# EAGLE board ATMEGA328P_Double (EAGLE 9.6.2)
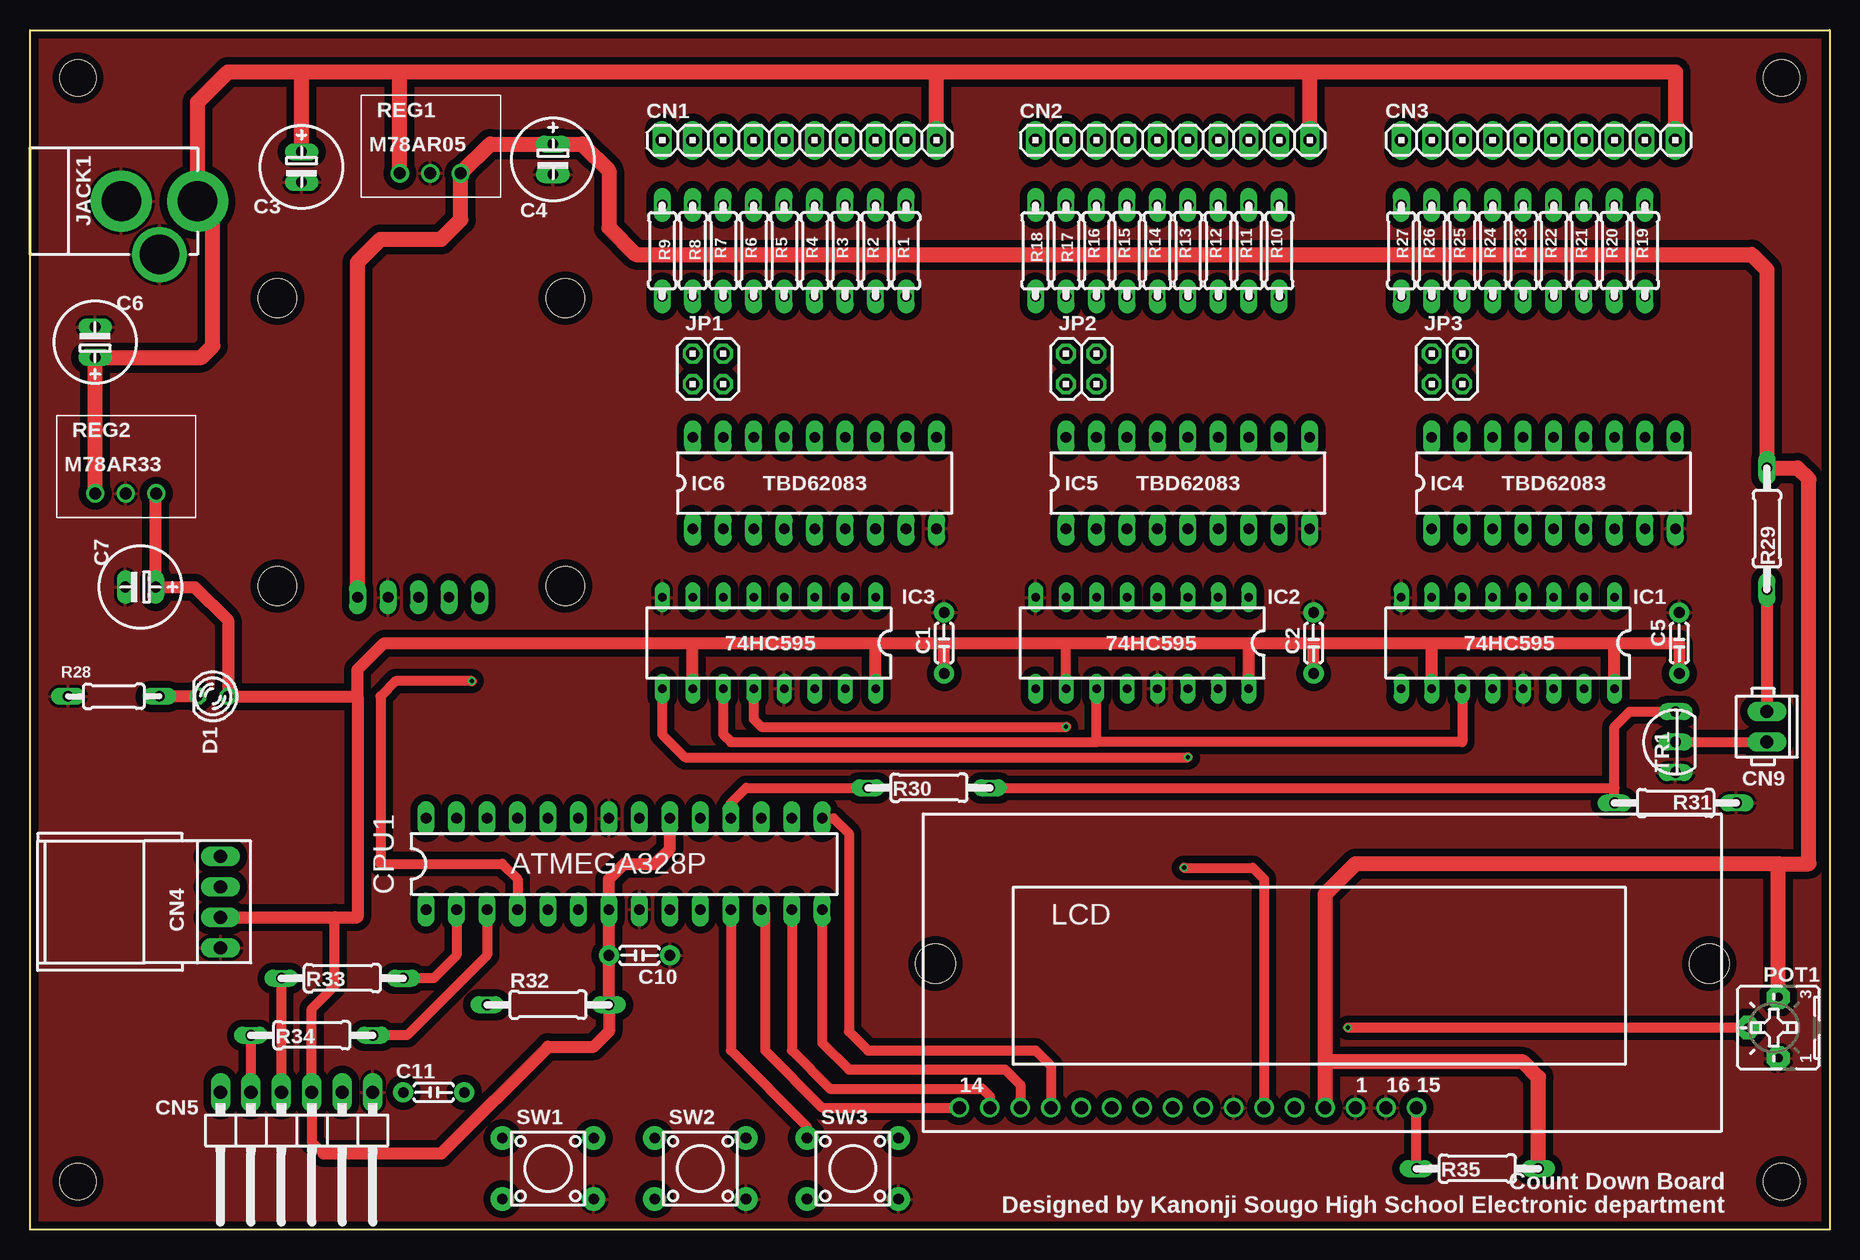
[diagram p0: board, top side]
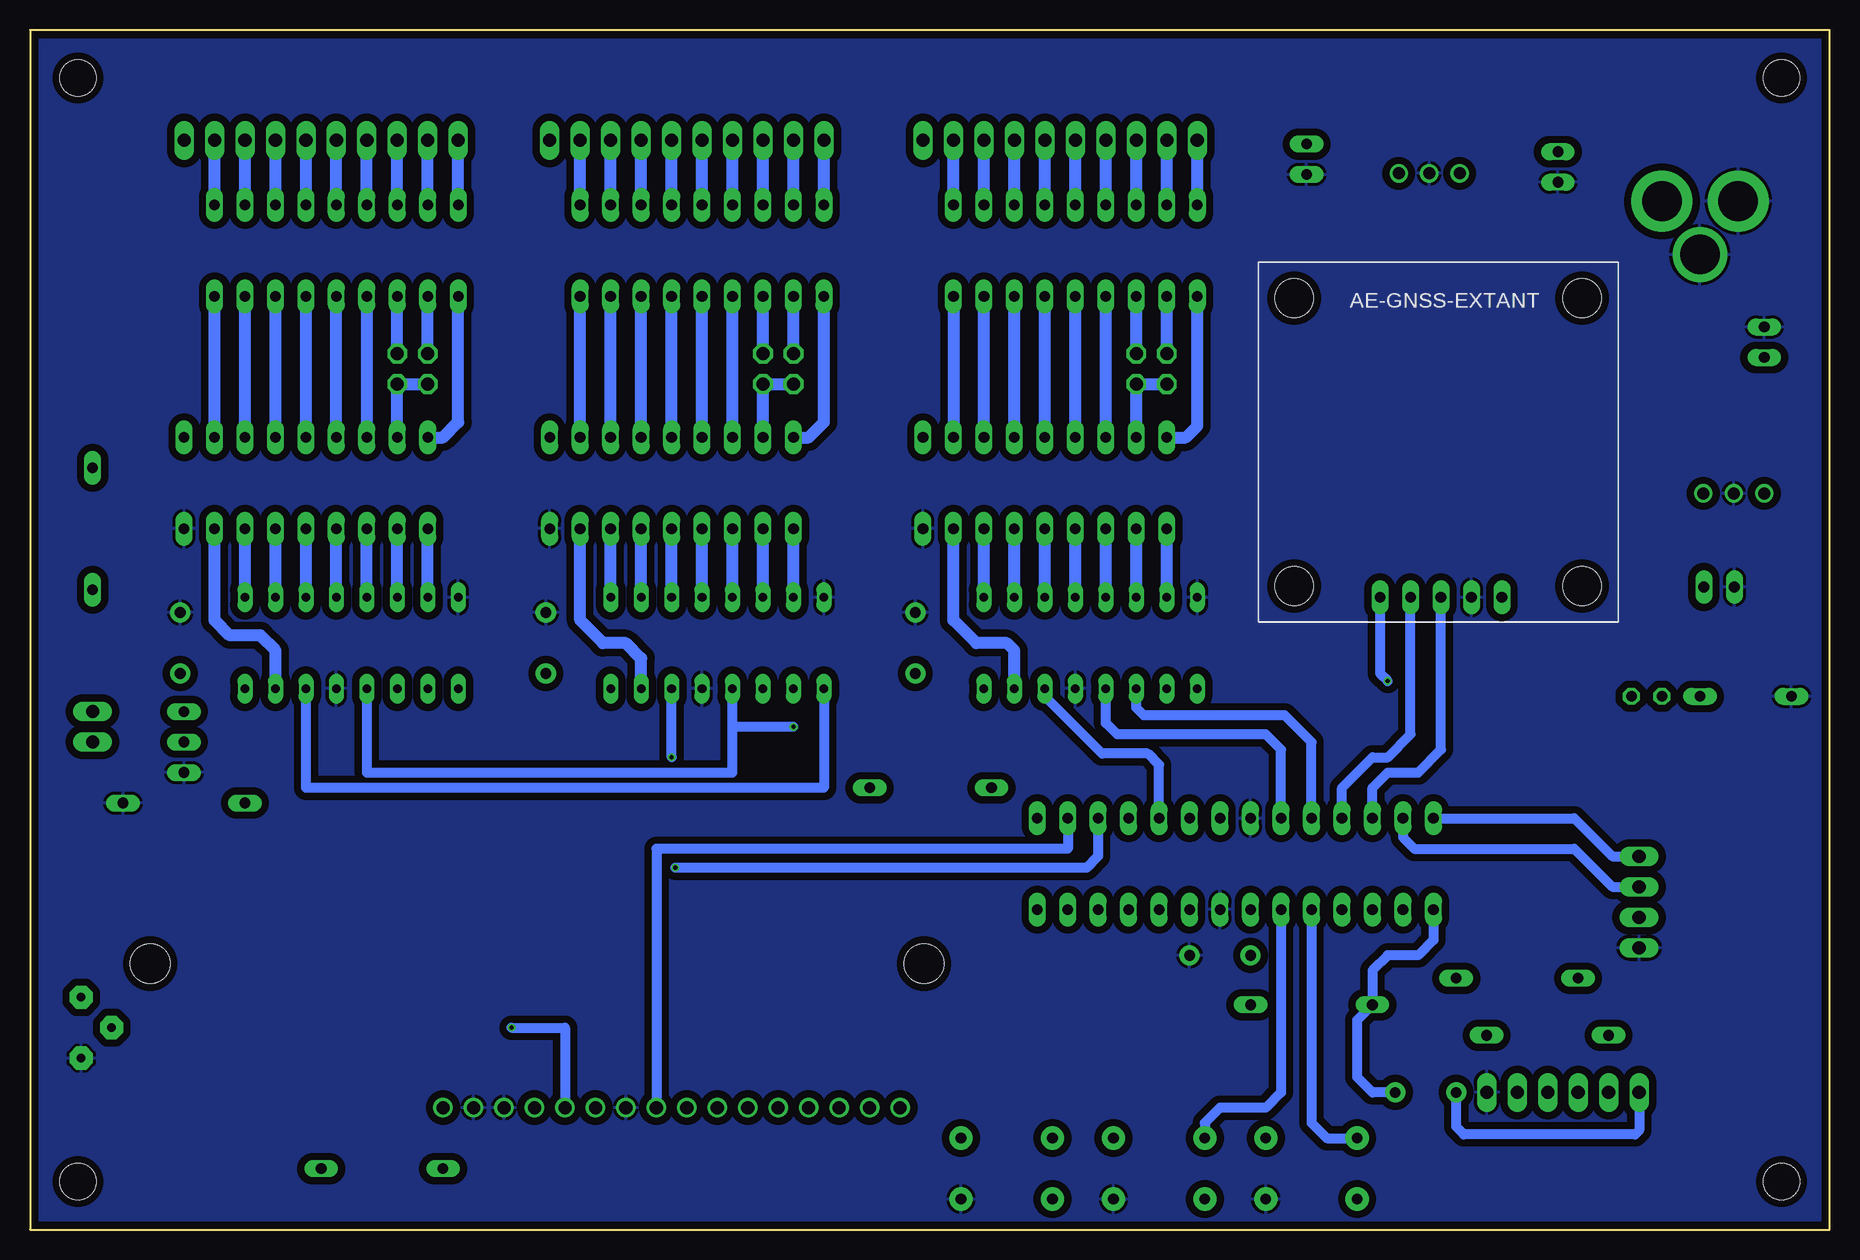
[diagram p1: board, bottom side, seen from below]

Size 150 x 100 mm. Coordinates in mm from the lower left corner, seen from the top.
Outline: 0,0 0,100 150,100 150,0 0,0
Copper layers (1*16): Top 0.035mm / dielectric 1.5mm / Bottom 0.035mm
Design rules "SeeedStudio_2layer_DRU_no_angle_20140221": minimum track width 6mil, minimum drill 12mil, track to track 6mil, track to pad 6mil, pad to pad 6mil, via to via 6mil, smd to smd 0mil, copper to edge 10mil, drill to drill 10mil, minimum pad ring 10mil, minimum via ring 6mil, stop-mask expansion 2mil, vias tented up to drill 100mil, thermal gap 10mil
Holes 3 mm at 4,96 146,96 146,4 4,4

## Footprints (pad centres in the part's own frame; a part is rotated, then mirrored left to right if it is on the bottom)
C5B3 = drill 0.889 pad 1.676: 1 -2.54,0; 2 2.54,0
E2,5-7 = drill 0.889 long: + -1.27,0; - 1.27,0
1X10 = drill 1.092 long: 1 -11.43,0; 2 -8.89,0; 3 -6.35,0; 4 -3.81,0; 5 -1.27,0; 6 1.27,0; 7 3.81,0; 8 6.35,0; 9 8.89,0; 10 11.43,0
4P-L = drill 1.092 long: 1 -3.81,0; 2 -1.27,0; 3 1.27,0; 4 3.81,0
1X06/90 = drill 1.092 long: 1 -6.35,-3.81; 2 -3.81,-3.81; 3 -1.27,-3.81; 4 1.27,-3.81; 5 3.81,-3.81; 6 6.35,-3.81
2P-S = drill 1.092 long: 1 -1.27,0; 2 1.27,0
DIL28-3 = drill 0.889 long: 1 -16.51,-3.81; 2 -13.97,-3.81; 3 -11.43,-3.81; 4 -8.89,-3.81; 5 -6.35,-3.81; 6 -3.81,-3.81; 7 -1.27,-3.81; 8 1.27,-3.81; 9 3.81,-3.81; 10 6.35,-3.81; 11 8.89,-3.81; 12 11.43,-3.81; 13 13.97,-3.81; 14 16.51,-3.81; 15 16.51,3.81; 16 13.97,3.81; 17 11.43,3.81; 18 8.89,3.81; 19 6.35,3.81; 20 3.81,3.81; 21 1.27,3.81; 22 -1.27,3.81; 23 -3.81,3.81; 24 -6.35,3.81; 25 -8.89,3.81; 26 -11.43,3.81; 27 -13.97,3.81; 28 -16.51,3.81
LED3MM = drill 0.889 octagon: A -1.27,0; K 1.27,0
AE-GNSS-EXTANT = drill 0.9 long: 1PPS 27.94,10.16; GND 27.94,17.78; RXD 27.94,12.7; TXD 27.94,15.24; VCC 27.94,20.32 | hole 3.2: 27,3; 27,27; 3,27; 3,3
DIL16 = drill 0.711 pad 1.27 long: 1 -8.89,-3.81; 2 -6.35,-3.81; 3 -3.81,-3.81; 4 -1.27,-3.81; 5 1.27,-3.81; 6 3.81,-3.81; 7 6.35,-3.81; 8 8.89,-3.81; 9 8.89,3.81; 10 6.35,3.81; 11 3.81,3.81; 12 1.27,3.81; 13 -1.27,3.81; 14 -3.81,3.81; 15 -6.35,3.81; 16 -8.89,3.81
DIL18 = drill 0.889 long: 1 -10.16,-3.81; 2 -7.62,-3.81; 3 -5.08,-3.81; 4 -2.54,-3.81; 5 0,-3.81; 6 2.54,-3.81; 7 5.08,-3.81; 8 7.62,-3.81; 9 10.16,-3.81; 10 10.16,3.81; 11 7.62,3.81; 12 5.08,3.81; 13 2.54,3.81; 14 0,3.81; 15 -2.54,3.81; 16 -5.08,3.81; 17 -7.62,3.81; 18 -10.16,3.81
DC15L = drill 3.302 pad 5.08: 1 0,0; 2 0,-6.35 | drill 3.302 pad 4.572: 3 4.445,-3.175
2X02 = drill 1.092 octagon: 1 -1.27,-1.27; 2 -1.27,1.27; 3 1.27,-1.27; 4 1.27,1.27
SD1602H = drill 1.092: 1 33.02,0; 2 30.48,0; 3 27.94,0; 4 25.4,0; 5 22.86,0; 6 20.32,0; 7 17.78,0; 8 15.24,0; 9 12.7,0; 10 10.16,0; 11 7.62,0; 12 5.08,0; 13 2.54,0; 14 0,0; 15 38.1,0; 16 35.56,0 | hole 3.302: -2,12; 62.5,12
POT_B25P = drill 0.711 pad 1.93 octagon: A -2.54,0; E 2.54,0; S 0,2.54
0207/7 = drill 0.889 long: 1 -3.81,0; 2 3.81,0
0204/7 = drill 0.889 long: 1 -3.81,0; 2 3.81,0
0207/10 = drill 0.889 long: 1 -5.08,0; 2 5.08,0
RE7805 = drill 1: GND 2.575,0.095; VIN 0.035,0.095; VOUT 5.115,0.095
B3F-10XX = drill 0.889 pad 1.93: 1 -3.81,2.54; 2 3.81,2.54; 3 -3.81,-2.54; 4 3.81,-2.54
TO92-LINE = drill 0.889 long: 1 2.54,0; 2 0,0; 3 -2.54,0

## Placement (x,y rotation side)
C1  0.1u  [C5B3]  76.2,48.9 90 top
C2  0.1u  [C5B3]  107,48.9 270 top
C3  100u  [E2,5-7]  22.64,88.58 270 top
C4  100u  [E2,5-7]  43.59,89.22 270 top
C5  0.1u  [C5B3]  137.48,48.9 270 top
C6  100u  [E2,5-7]  5.43,73.98 90 top
C7  100u  [E2,5-7]  9.21,53.56 180 top
C10  0.1u  [C5B3]  50.8,22.86 180 top
C11  [C5B3]  33.66,11.43 0 top
CN1  SEG_1  [1X10]  64.14,90.81 0 top
CN2  SEG_2  [1X10]  95.25,90.81 0 top
CN3  SEG_3  [1X10]  125.73,90.81 0 top
CN4  To I2C Device  [4P-L]  15.88,27.3 90 top
CN5  Writer  [1X06/90]  22.23,7.62 180 top
CN9  1PPS  [2P-S]  144.78,41.91 90 top
CPU1  ATMEGA328P  [DIL28-3]  49.53,30.48 0 top
D1  [LED3MM]  15.24,44.45 180 top
GPS1  [AE-GNSS-EXTANT]  47.62,80.64 270 bottom
IC1  74HC595  [DIL16]  123.19,48.9 180 top
IC2  74HC595  [DIL16]  92.71,48.9 180 top
IC3  74HC595  [DIL16]  61.59,48.9 180 top
IC4  TBD62083  [DIL18]  127,62.23 0 top
IC5  TBD62083  [DIL18]  96.52,62.23 0 top
IC6  TBD62083  [DIL18]  65.41,62.23 0 top
JACK1  [DC15L]  13.97,85.72 270 top
JP1  [2X02]  56.52,71.75 0 top
JP2  [2X02]  87.63,71.75 0 top
JP3  [2X02]  118.11,71.75 0 top
LCD  [SD1602H]  77.47,10.16 0 top
POT1  [POT_B25P]  145.73,16.83 90 top
R1  1k  [0207/7]  73.03,81.6 90 top
R2  1k  [0207/7]  70.48,81.6 90 top
R3  1k  [0207/7]  67.94,81.6 90 top
R4  1k  [0207/7]  65.41,81.6 90 top
R5  1k  [0207/7]  62.87,81.6 90 top
R6  1k  [0207/7]  60.33,81.6 90 top
R7  1k  [0207/7]  57.78,81.6 90 top
R8  1k  [0207/7]  55.24,81.6 90 top
R9  1k  [0207/7]  52.7,81.6 270 top
R10  1k  [0207/7]  104.14,81.6 90 top
R11  1k  [0207/7]  101.6,81.6 90 top
R12  1k  [0207/7]  99.06,81.6 90 top
R13  1k  [0207/7]  96.52,81.6 90 top
R14  1k  [0207/7]  93.98,81.6 90 top
R15  1k  [0207/7]  91.44,81.6 90 top
R16  1k  [0207/7]  88.9,81.6 90 top
R17  1k  [0207/7]  86.36,81.6 90 top
R18  1k  [0207/7]  83.82,81.6 270 top
R19  1k  [0207/7]  134.62,81.6 90 top
R20  1k  [0207/7]  132.08,81.6 90 top
R21  1k  [0207/7]  129.54,81.6 90 top
R22  1k  [0207/7]  127,81.6 90 top
R23  1k  [0207/7]  124.46,81.6 90 top
R24  1k  [0207/7]  121.92,81.6 90 top
R25  1k  [0207/7]  119.38,81.6 90 top
R26  1k  [0207/7]  116.84,81.6 90 top
R27  1k  [0207/7]  114.3,81.6 270 top
R28  1k  [0204/7]  6.99,44.45 180 top
R29  1k  [0207/10]  144.78,58.42 90 top
R30  1k  [0207/10]  74.93,36.83 0 top
R31  10k  [0207/10]  137.16,35.56 180 top
R32  10k  [0207/10]  43.18,18.73 0 top
R33  1k  [0207/10]  26.04,20.95 0 top
R34  1k  [0207/10]  23.5,16.19 0 top
R35  150  [0207/10]  120.65,5.08 0 top
REG1  M78AR05  [RE7805]  30.8,87.95 0 top
REG2  M78AR33  [RE7805]  5.4,61.28 0 top
SW1  [B3F-10XX]  43.18,5.08 0 top
SW2  [B3F-10XX]  55.88,5.08 0 top
SW3  [B3F-10XX]  68.58,5.08 0 top
TR1  2SC1815  [TO92-LINE]  137.16,40.64 90 top

## Library data of the parts
C1 C2 C5 C10 C11 = 1-cr
C3 C4 C6 C7 R1-R35 TR1 = akihabara
CN1-CN3 CN5 JP1-JP3 = pinhead
CN4 CN9 = 1-conn-jst
CPU1 IC4-IC6 = microchip
D1 IC1-IC3 POT1 = MyLib
GPS1 = akiduki
JACK1 = 1-conn
LCD = 1-display
REG1 REG2 = MCR_parts
SW1-SW3 = 1-sw

## Nets
1PPS/D2 [Signal]: CPU1.4 GPS1.1PPS
+3.3V [VCC]: C1.1 C2.2 C5.2 C7.+ C10.2 CN4.2 CN5.3 CPU1.7 CPU1.20 D1.A IC1.10 IC1.16 IC2.10 IC2.16 IC3.10 IC3.16 R32.2 REG2.VOUT
+5V [VCC]: C4.+ GPS1.VCC LCD.2 POT1.E R29.2 R35.2 REG1.VOUT
+VIN [VCC]: C3.+ C6.+ CN1.10 CN2.10 CN3.10 JACK1.1 REG1.VIN REG2.VIN
A4/SDA [Signal]: CN4.3 CPU1.27
A5/SCL [Signal]: CN4.4 CPU1.28
D1_A [Signal]: D1.K R28.1
DB4 [Signal]: CPU1.15 LCD.11
DB5 [Signal]: CPU1.14 LCD.12
DB6 [Signal]: CPU1.13 LCD.13
DB7 [Signal]: CPU1.12 LCD.14
DTR [Signal]: C11.1 CN5.6
EN [Signal]: CPU1.16 LCD.6
GND [GND]: C1.2 C2.1 C3.- C4.- C5.1 C6.- C7.- C10.1 CN4.1 CN5.1 CPU1.8 CPU1.22 GPS1.GND IC1.8 IC1.13 IC2.8 IC2.13 IC3.8 IC3.13 IC4.9 IC5.9 IC6.9 JACK1.2 JACK1.3 LCD.1 LCD.5 LCD.16 POT1.A R28.2 R31.1 REG1.GND REG2.GND SW1.4 SW2.4 SW3.4 TR1.3
GPS_RXD [Signal]: CPU1.25 GPS1.RXD
GPS_TXD [Signal]: CPU1.26 GPS1.TXD
IN_SEG1_A [Signal]: IC3.2 IC6.6
IN_SEG1_B [Signal]: IC3.3 IC6.5
IN_SEG1_C [Signal]: IC3.7 IC6.1
IN_SEG1_D [Signal]: IC3.5 IC6.3
IN_SEG1_DP [Signal]: IC3.6 IC6.2
IN_SEG1_E [Signal]: IC3.4 IC6.4
IN_SEG1_F [Signal]: IC3.15 IC6.8
IN_SEG1_G [Signal]: IC3.1 IC6.7
IN_SEG2_A [Signal]: IC2.2 IC5.6
IN_SEG2_B [Signal]: IC2.3 IC5.5
IN_SEG2_C [Signal]: IC2.7 IC5.1
IN_SEG2_D [Signal]: IC2.5 IC5.3
IN_SEG2_DP [Signal]: IC2.6 IC5.2
IN_SEG2_E [Signal]: IC2.4 IC5.4
IN_SEG2_F [Signal]: IC2.15 IC5.8
IN_SEG2_G [Signal]: IC2.1 IC5.7
IN_SEG3_A [Signal]: IC1.2 IC4.6
IN_SEG3_B [Signal]: IC1.3 IC4.5
IN_SEG3_C [Signal]: IC1.7 IC4.1
IN_SEG3_D [Signal]: IC1.5 IC4.3
IN_SEG3_DP [Signal]: IC1.6 IC4.2
IN_SEG3_E [Signal]: IC1.4 IC4.4
IN_SEG3_F [Signal]: IC1.15 IC4.8
IN_SEG3_G [Signal]: IC1.1 IC4.7
LCD_ANODE [Signal]: LCD.15 R35.1
OUT_1PPS [Signal]: CPU1.18 R30.1
OUT_LED_A [Signal]: CN9.2 R29.1
OUT_LED_K [Signal]: CN9.1 TR1.2
OUT_SEG1__DP [Signal]: IC6.17 JP1.1 JP1.3
OUT_SEG1_A [Signal]: IC6.13 R3.1
OUT_SEG1_B [Signal]: IC6.14 R4.1
OUT_SEG1_C [Signal]: IC6.18 R9.2
OUT_SEG1_D [Signal]: IC6.16 R6.1
OUT_SEG1_E [Signal]: IC6.15 R5.1
OUT_SEG1_F [Signal]: IC6.11 R1.1
OUT_SEG1_G [Signal]: IC6.12 R2.1
OUT_SEG2_A [Signal]: IC5.13 R12.1
OUT_SEG2_B [Signal]: IC5.14 R13.1
OUT_SEG2_C [Signal]: IC5.18 R18.2
OUT_SEG2_D [Signal]: IC5.16 R15.1
OUT_SEG2_DP [Signal]: IC5.17 JP2.1 JP2.3
OUT_SEG2_DP1 [Signal]: JP2.2 R17.1
OUT_SEG2_DP2 [Signal]: JP2.4 R16.1
OUT_SEG2_E [Signal]: IC5.15 R14.1
OUT_SEG2_F [Signal]: IC5.11 R10.1
OUT_SEG2_G [Signal]: IC5.12 R11.1
OUT_SEG3_A [Signal]: IC4.13 R21.1
OUT_SEG3_B [Signal]: IC4.14 R22.1
OUT_SEG3_C [Signal]: IC4.18 R27.2
OUT_SEG3_D [Signal]: IC4.16 R24.1
OUT_SEG3_DP [Signal]: IC4.17 JP3.1 JP3.3
OUT_SEG3_DP1 [Signal]: JP3.2 R26.1
OUT_SEG3_DP2 [Signal]: JP3.4 R25.1
OUT_SEG3_E [Signal]: IC4.15 R23.1
OUT_SEG3_F [Signal]: IC4.11 R19.1
OUT_SEG3_G [Signal]: IC4.12 R20.1
OUT_SEG_DP1 [Signal]: JP1.2 R8.1
OUT_SEG_DP2 [Signal]: JP1.4 R7.1
QH1->SER [Signal]: IC2.14 IC3.9
QH2-SER [Signal]: IC1.14 IC2.9
RCLK [Signal]: CPU1.23 IC1.12 IC2.12 IC3.12
RS [Signal]: CPU1.17 LCD.4
RST [Signal]: C11.2 CPU1.1 R32.1
RXD [Signal]: CPU1.2 R33.2
RXI<-TXD [Signal]: CN5.5 R34.1
SCLK [Signal]: CPU1.24 IC1.11 IC2.11 IC3.11
SEG1_A [Signal]: CN1.7 R3.2
SEG1_B [Signal]: CN1.6 R4.2
SEG1_C [Signal]: CN1.1 R9.1
SEG1_D [Signal]: CN1.4 R6.2
SEG1_DP1 [Signal]: CN1.2 R8.2
SEG1_DP2 [Signal]: CN1.3 R7.2
SEG1_E [Signal]: CN1.5 R5.2
SEG1_F [Signal]: CN1.9 R1.2
SEG1_G [Signal]: CN1.8 R2.2
SEG2_A [Signal]: CN2.7 R12.2
SEG2_B [Signal]: CN2.6 R13.2
SEG2_C [Signal]: CN2.1 R18.1
SEG2_D [Signal]: CN2.4 R15.2
SEG2_DP1 [Signal]: CN2.2 R17.2
SEG2_DP2 [Signal]: CN2.3 R16.2
SEG2_E [Signal]: CN2.5 R14.2
SEG2_F [Signal]: CN2.9 R10.2
SEG2_G [Signal]: CN2.8 R11.2
SEG3_A [Signal]: CN3.7 R21.2
SEG3_B [Signal]: CN3.6 R22.2
SEG3_C [Signal]: CN3.1 R27.1
SEG3_D [Signal]: CN3.4 R24.2
SEG3_DP1 [Signal]: CN3.2 R26.2
SEG3_DP2 [Signal]: CN3.3 R25.2
SEG3_E [Signal]: CN3.5 R23.2
SEG3_F [Signal]: CN3.9 R19.2
SEG3_G [Signal]: CN3.8 R20.2
SER/D12 [Signal]: CPU1.19 IC3.14
SW1 [Signal]: CPU1.5 SW1.1
SW2 [Signal]: CPU1.6 SW2.1
SW3/D4 [Signal]: CPU1.11 SW3.1
TR1_B [Signal]: R30.2 R31.2 TR1.1
TXD [Signal]: CPU1.3 R34.2
TXD->RXD [Signal]: CN5.4 R33.1
VO [Signal]: LCD.3 POT1.S

## Tracks (layer width: path | path; a pad name or v marks a point on that pad's centre or on a via)
1PPS/D2  (via drill 0.35)
  Top 0.813: v36.83,45.72 30.48,45.72 29.21,44.45 29.21,30.48 39.37,30.48 40.64,29.21 CPU1.4
  Bottom 0.813: GPS1.1PPS 37.47,46.35 v36.83,45.72
+3.3V
  Top 0.813: IC2.10 86.36,48.9 | 24.45,6.35 23.5,7.3 CN5.3 23.5,18.41 25.4,20.32 25.4,26.04
  Top 1.016: 27.3,44.45 27.3,46.67 29.53,48.9 55.24,48.9 | 27.3,44.45 D1.A 16.51,50.8 13.75,53.56 C7.+ 10.48,61.37 REG2.VOUT | 55.24,48.9 70.8,48.9 | 70.8,48.9 76.52,48.9 | 76.52,48.9 86.36,48.9 101.6,48.9 | 101.6,48.9 107,48.9 | 107,48.9 116.84,48.9 | 116.84,48.9 132.08,48.9 | 132.08,48.9 137.48,48.9 C5.2 | IC1.16 132.08,48.9 | IC1.10 116.84,48.9 | C2.2 107,48.9 | IC2.16 101.6,48.9 | C1.1 76.2,48.58 76.52,48.9 | IC3.16 70.48,48.58 70.8,48.9 | IC3.10 55.24,48.9 | CN4.2 25.4,26.04 27.3,26.04 27.3,44.45 | CPU1.20 53.34,31.75 52.07,30.48 49.53,30.48 48.26,29.21 CPU1.7 C10.2 R32.2 48.26,16.51 46.99,15.24 43.18,15.24 34.29,6.35 24.45,6.35
+5V
  Top 1.27: GPS1.VCC 27.3,80.64 29.21,82.55 34.29,82.55 35.91,84.17 REG1.VOUT 38.36,90.49 C4.+ 46.04,90.49 48.26,88.27 48.26,83.5 50.48,81.28 143.51,81.28 144.78,80.01 R29.2 147.32,63.5 148.27,62.55 148.27,30.48 145.73,30.48 | 145.73,30.48 110.49,30.48 107.95,27.94 107.95,13.97 | 107.95,13.97 LCD.2 | POT1.E 145.73,30.48 | R35.2 125.73,12.7 124.46,13.97 107.95,13.97
+VIN
  Top 1.27: REG2.VIN C6.+ 14.29,72.71 15.24,73.66 15.24,84.45 JACK1.1 13.97,93.98 16.51,96.52 22.64,96.52 | 22.64,96.52 30.83,96.52 | 30.83,96.52 75.56,96.52 | 75.56,96.52 106.68,96.52 | 106.68,96.52 137.16,96.52 CN3.10 | CN2.10 106.68,96.52 | CN1.10 75.56,96.52 | REG1.VIN 30.83,96.52 | C3.+ 22.64,96.52
A4/SDA
  Bottom 0.813: CPU1.27 35.56,32.7 34.61,31.75 21.27,31.75 18.1,28.57 CN4.3
A5/SCL
  Bottom 0.813: CN4.4 18.1,31.11 21.27,34.29 CPU1.28
D1_A
  Top 1.016: D1.K R28.1
DB4
  Top 0.813: CPU1.15 66.99,34.29 68.26,33.02 68.26,16.51 69.85,14.92 83.82,14.92 85.09,13.65 LCD.11
DB5
  Top 0.813: CPU1.14 66.04,15.56 68.26,13.34 81.28,13.34 82.55,12.06 LCD.12
DB6
  Top 0.813: CPU1.13 63.5,14.92 66.67,11.75 79.38,11.75 80.01,11.11 LCD.13
DB7
  Top 0.813: CPU1.12 61.28,26.35 61.28,14.92 66.04,10.16 LCD.14
DTR
  Bottom 0.813: CN5.6 15.88,8.26 16.19,7.94 30.48,7.94 31.11,8.57 C11.1
EN
  Bottom 0.813: CPU1.16 63.5,31.75 97.79,31.75 LCD.6
GND
  pour Top (isolate 0.61): -1.27,101.47 151.13,101.47 151.13,-1.27 -1.27,-1.27
  pour Bottom (isolate 0.61): -1.27,101.47 151.13,101.47 151.13,-1.27 -1.27,-1.27
GPS_RXD
  Bottom 0.813: CPU1.25 40.64,36.83 38.1,39.37 36.83,39.37 34.92,41.27 GPS1.RXD
GPS_TXD
  Bottom 0.813: CPU1.26 38.1,36.83 36.83,38.1 34.29,38.1 32.38,40.01 GPS1.TXD
IN_SEG1_A
  Bottom 1.016: IC3.2 IC6.6
IN_SEG1_B
  Bottom 1.016: IC3.3 IC6.5
IN_SEG1_C
  Bottom 1.016: IC3.7 IC6.1
IN_SEG1_D
  Bottom 1.016: IC3.5 IC6.3
IN_SEG1_DP
  Bottom 1.016: IC3.6 IC6.2
IN_SEG1_E
  Bottom 1.016: IC3.4 IC6.4
IN_SEG1_F
  Bottom 1.016: IC3.15 67.94,48.26 68.58,48.9 71.12,48.9 73.03,50.8 IC6.8
IN_SEG1_G
  Bottom 1.016: IC3.1 IC6.7
IN_SEG2_A
  Bottom 1.016: IC2.2 IC5.6
IN_SEG2_B
  Bottom 1.016: IC2.3 IC5.5
IN_SEG2_C
  Bottom 1.016: IC2.7 IC5.1
IN_SEG2_D
  Bottom 1.016: IC2.5 IC5.3
IN_SEG2_DP
  Bottom 1.016: IC2.6 IC5.2
IN_SEG2_E
  Bottom 1.016: IC2.4 IC5.4
IN_SEG2_F
  Bottom 1.016: IC2.15 99.06,47.62 100.33,48.9 102.23,48.9 104.14,50.8 IC5.8
IN_SEG2_G
  Bottom 1.016: IC2.1 IC5.7
IN_SEG3_A
  Bottom 1.016: IC1.2 IC4.6
IN_SEG3_B
  Bottom 1.016: IC1.3 IC4.5
IN_SEG3_C
  Bottom 1.016: IC1.7 IC4.1
IN_SEG3_D
  Bottom 1.016: IC1.5 IC4.3
IN_SEG3_DP
  Bottom 1.016: IC1.6 IC4.2
IN_SEG3_E
  Bottom 1.016: IC1.4 IC4.4
IN_SEG3_F
  Bottom 1.016: IC1.15 129.54,48.26 130.81,49.53 133.35,49.53 134.62,50.8 IC4.8
IN_SEG3_G
  Bottom 1.016: IC1.1 IC4.7
LCD_ANODE
  Top 0.813: R35.1 LCD.15
OUT_1PPS
  Top 0.813: CPU1.18 58.42,35.56 59.69,36.83 R30.1
OUT_LED_A
  Top 1.016: R29.1 CN9.2
OUT_LED_K
  Top 0.813: TR1.2 CN9.1
OUT_SEG1__DP
  Bottom 1.016: IC6.17 JP1.3 JP1.1
OUT_SEG1_A
  Bottom 1.016: IC6.13 R3.1
OUT_SEG1_B
  Bottom 1.016: IC6.14 R4.1
OUT_SEG1_C
  Bottom 1.016: IC6.18 53.66,66.04 52.7,66.99 R9.2
OUT_SEG1_D
  Bottom 1.016: IC6.16 R6.1
OUT_SEG1_E
  Bottom 1.016: IC6.15 R5.1
OUT_SEG1_F
  Bottom 1.016: R1.1 IC6.11
OUT_SEG1_G
  Bottom 1.016: IC6.12 R2.1
OUT_SEG2_A
  Bottom 1.016: IC5.13 R12.1
OUT_SEG2_B
  Bottom 1.016: IC5.14 R13.1
OUT_SEG2_C
  Bottom 1.016: IC5.18 85.09,66.04 83.82,67.31 R18.2
OUT_SEG2_D
  Bottom 1.016: IC5.16 R15.1
OUT_SEG2_DP
  Bottom 1.016: IC5.17 JP2.3 JP2.1
OUT_SEG2_DP1
  Bottom 1.016: JP2.2 R17.1
OUT_SEG2_DP2
  Bottom 1.016: JP2.4 R16.1
OUT_SEG2_E
  Bottom 1.016: IC5.15 R14.1
OUT_SEG2_F
  Bottom 1.016: IC5.11 R10.1
OUT_SEG2_G
  Bottom 1.016: IC5.12 R11.1
OUT_SEG3_A
  Bottom 1.016: IC4.13 R21.1
OUT_SEG3_B
  Bottom 1.016: IC4.14 R22.1
OUT_SEG3_C
  Bottom 1.016: IC4.18 115.57,66.04 114.3,67.31 R27.2
OUT_SEG3_D
  Bottom 1.016: R24.1 IC4.16
OUT_SEG3_DP
  Bottom 1.016: IC4.17 JP3.3 JP3.1
OUT_SEG3_DP1
  Bottom 1.016: JP3.2 R26.1
OUT_SEG3_DP2
  Bottom 1.016: JP3.4 R25.1
OUT_SEG3_E
  Bottom 1.016: IC4.15 R23.1
OUT_SEG3_F
  Bottom 1.016: IC4.11 R19.1
OUT_SEG3_G
  Bottom 1.016: IC4.12 R20.1
OUT_SEG_DP1
  Bottom 1.016: JP1.2 R8.1
OUT_SEG_DP2
  Bottom 1.016: JP1.4 R7.1
QH1->SER  (via drill 0.35)
  Top 0.813: IC3.9 52.7,41.27 54.61,39.37 v96.52,39.37
  Bottom 0.813: v96.52,39.37 IC2.14
QH2-SER
  Bottom 0.813: IC2.9 83.82,36.83 127,36.83 IC1.14
RCLK  (via drill 0.35)
  Top 0.813: IC3.12 60.33,42.55 60.96,41.91 v86.36,41.91
  Bottom 0.813: v86.36,41.91 91.44,41.91 | 91.44,41.91 IC2.12 | IC1.12 121.92,38.1 91.44,38.1 91.44,41.91 | CPU1.23 45.72,40.01 46.99,41.27 59.37,41.27 60.33,42.23 IC3.12
RS  (via drill 0.35)
  Top 0.813: v96.2,30.16 101.92,30.16 102.87,29.21 LCD.4
  Bottom 0.813: CPU1.17 60.96,31.11 61.91,30.16 v96.2,30.16
RST
  Bottom 0.813: CPU1.1 33.02,24.13 34.29,22.86 36.83,22.86 38.1,21.59 R32.1 39.37,17.46 39.37,12.7 38.1,11.43 C11.2
RXD
  Top 0.813: CPU1.2 35.56,22.86 33.66,20.95 R33.2
RXI<-TXD
  Top 0.813: R34.1 CN5.5
SCLK
  Top 0.813: IC3.11 57.78,41.27 58.42,40.64 88.9,40.64 | 88.9,40.64 IC2.11 | IC1.11 119.38,40.64 88.9,40.64
  Bottom 0.813: CPU1.24 43.18,40.64 45.4,42.86 57.15,42.86 57.78,43.5 IC3.11
SEG1_A
  Bottom 1.016: R3.2 CN1.7
SEG1_B
  Bottom 1.016: R4.2 CN1.6
SEG1_C
  Bottom 1.016: R9.1 CN1.1
SEG1_D
  Bottom 1.016: R6.2 CN1.4
SEG1_DP1
  Bottom 1.016: R8.2 CN1.2
SEG1_DP2
  Bottom 1.016: R7.2 CN1.3
SEG1_E
  Bottom 1.016: R5.2 CN1.5
SEG1_F
  Bottom 1.016: R1.2 CN1.9
SEG1_G
  Bottom 1.016: R2.2 CN1.8
SEG2_A
  Bottom 1.016: R12.2 CN2.7
SEG2_B
  Bottom 1.016: R13.2 CN2.6
SEG2_C
  Bottom 1.016: R18.1 CN2.1
SEG2_D
  Bottom 1.016: R15.2 CN2.4
SEG2_DP1
  Bottom 1.016: R17.2 CN2.2
SEG2_DP2
  Bottom 1.016: R16.2 CN2.3
SEG2_E
  Bottom 1.016: R14.2 CN2.5
SEG2_F
  Bottom 1.016: R10.2 CN2.9
SEG2_G
  Bottom 1.016: R11.2 CN2.8
SEG3_A
  Bottom 1.016: R21.2 CN3.7
SEG3_B
  Bottom 1.016: R22.2 CN3.6
SEG3_C
  Bottom 1.016: R27.1 CN3.1
SEG3_D
  Bottom 1.016: R24.2 CN3.4
SEG3_DP1
  Bottom 1.016: R26.2 CN3.2
SEG3_DP2
  Bottom 1.016: R25.2 CN3.3
SEG3_E
  Bottom 1.016: R23.2 CN3.5
SEG3_F
  Bottom 1.016: R19.2 CN3.9
SEG3_G
  Bottom 1.016: R20.2 CN3.8
SER/D12
  Bottom 0.813: CPU1.19 55.88,38.73 56.83,39.69 60.64,39.69 65.41,44.45 IC3.14
SW1
  Bottom 0.813: CPU1.5 43.18,8.89 41.91,7.62 SW1.1
SW2
  Bottom 0.813: CPU1.6 45.72,11.43 46.99,10.16 50.8,10.16 52.07,8.89 SW2.1
SW3/D4
  Top 0.813: CPU1.11 58.42,14.92 64.77,8.57 SW3.1
TR1_B
  Top 0.813: R31.2 132.08,36.83 | R30.2 132.08,36.83 | 132.08,36.83 132.08,41.91 133.35,43.18 TR1.1
TXD
  Top 0.813: CPU1.3 38.1,22.86 31.43,16.19 R34.2
TXD->RXD
  Top 0.813: R33.1 CN5.4
VO  (via drill 0.35)
  Top 0.813: POT1.S v109.86,16.83
  Bottom 0.813: v109.86,16.83 105.41,16.83 LCD.3

## Text on the board
tPlace: Count Down Board / Designed by Kanonji Sougo High School Electronic department